# Altium PCB MEGA PROJECTPcbDoc.PcbDoc
Units mm, origin at the board's own origin, x right, y up, seen from the top; angles counter-clockwise.
Board outline 68.2 x 34.42 mm, 2 copper layers (Top Layer, Bottom Layer), stack 1.569 mm thick; 26 components, 32 nets, 117 pads, 12 vias.
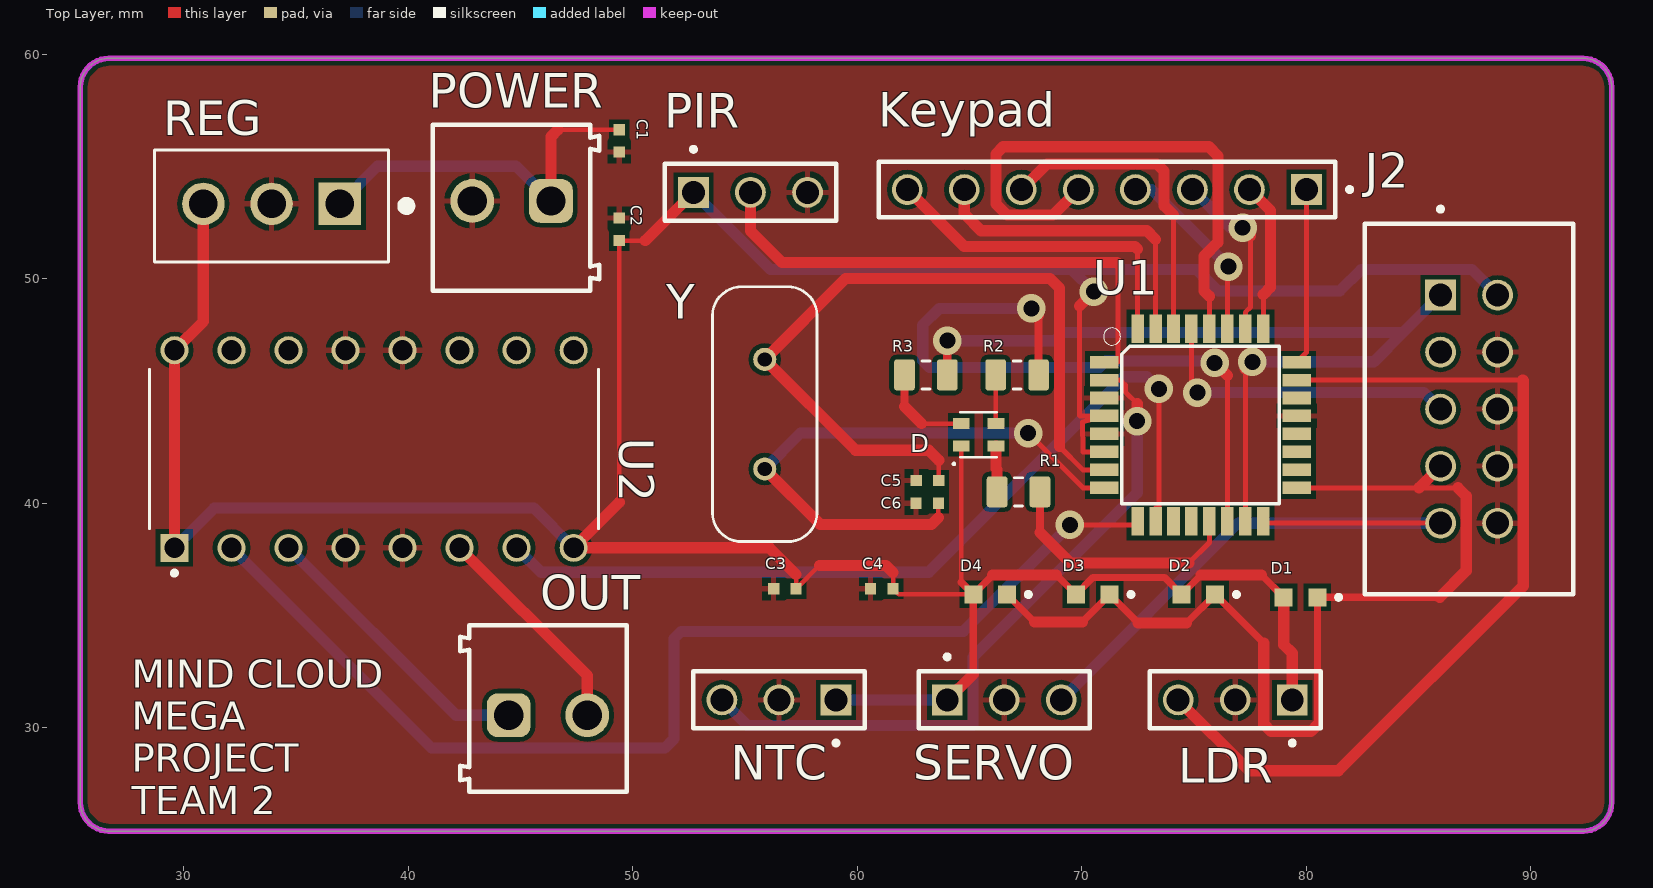
[diagram p0: Top Layer view]
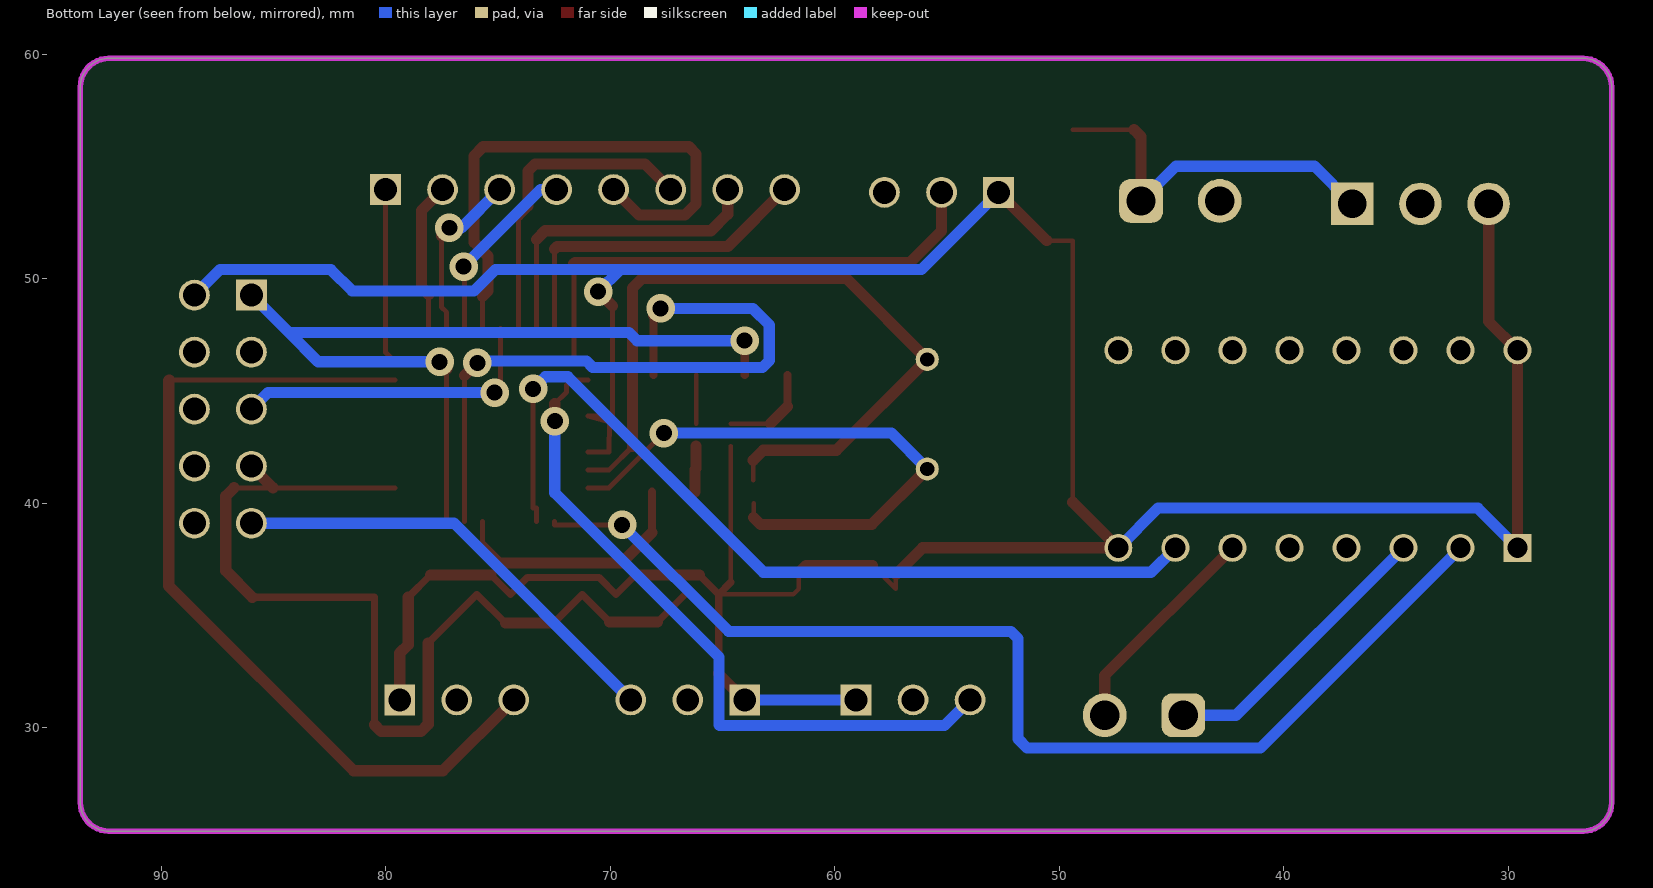
[diagram p1: Bottom Layer view, seen from below]
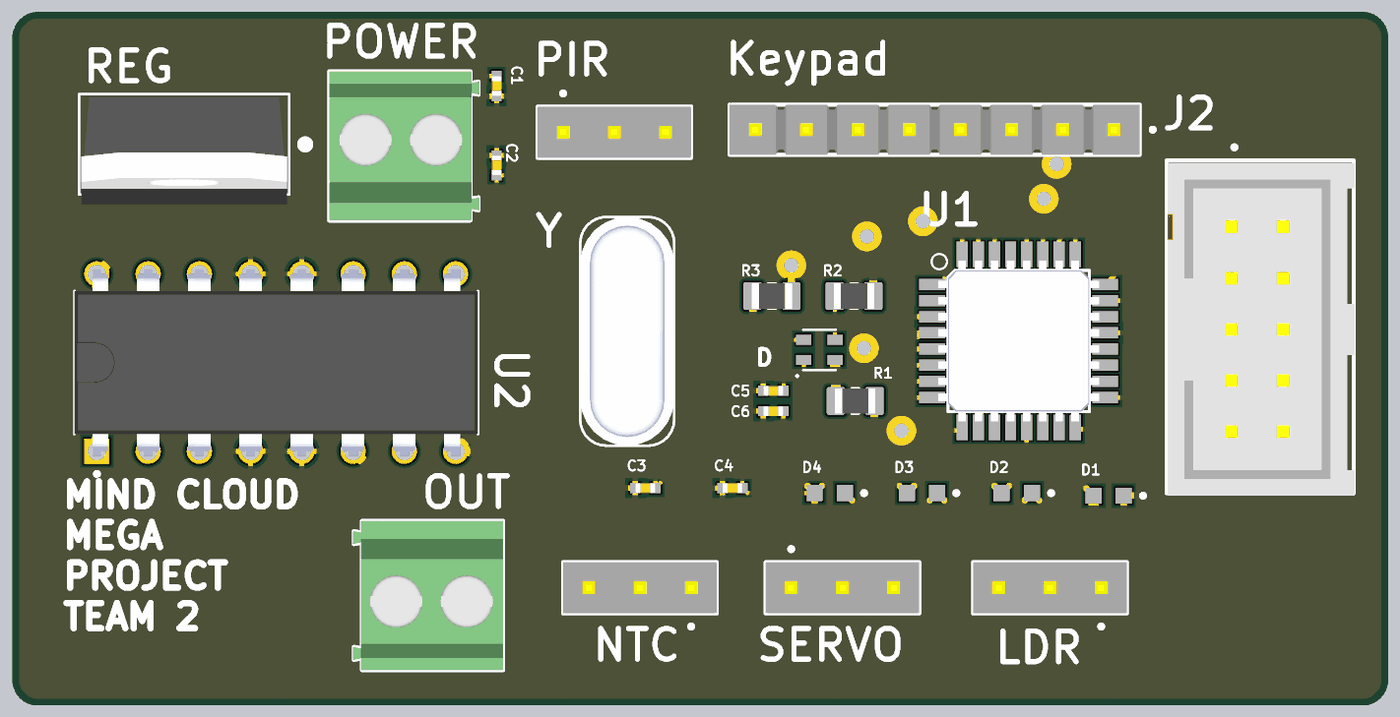
[diagram p2: 3D render of the assembled board from above, using the file's embedded part models]

## Layer stack, top to bottom
Top Solder: solder mask 0.0254, SM-001, Dk 4
Top Layer: signal copper 0.035
Dielectric 1: core 1.4986, Core-043, Dk 4.3
Bottom Layer: signal copper 0.035
Bottom Solder: solder mask 0.0254, SM-001, Dk 4

## Board outline
25.4,26.67 25.4,28.321 25.4,58.547 cw(c26.67,58.547) 26.67,59.817 92.329,59.817 cw(c92.329,58.547) 93.599,58.547 93.599,26.67 cw(c92.329,26.67) 92.329,25.4 26.67,25.4 cw(c26.67,26.67)

## Design rules (kind name [scope] priority, off if disabled: settings)
Clearance [All] p1: gap=0.2 ignorepadtopadclearanceinfootprint=FALSE
PolygonConnect [All] p1: connectstyle=Relief reliefconductorwidth=0.254 reliefentries=4 polygonreliefangle="90 Angle" airgapwidth=0.254
RoutingVias [All] p1: holewidth=0.711 width=1.27 viastyle="Through Hole" minholewidth=0.711 minwidth=1.27 maxholewidth=0.711 maxwidth=1.27
SMDNeckDown [All] p1: percent=40.000
SolderMaskExpansion [All] p1: expansion=0.102 istentingtop=FALSE
Width [All] p1: maxlimit=0.7 minlimit=0.1 preferedwidth=0.5
30 further rules are at their usual default settings.

## Components (designator, comment, footprint, x,y, rotation, side; value= is the part's Value field where it differs from the comment)
C1 "330pF" CAP 49.403,56.142 r270 top
C2 "330pF" CAP 49.403,52.205 r270 top
C3 "100pF" CAP 56.777,36.195 r0 top
C4 "100pF" CAP 61.095,36.195 r0 top
C5 "22pF" CAP 63.127,41.021 r0 top
C6 "22pF" CAP 63.119,40.005 r0 top
D "RGB" RGB 65.405,43.053 r90 top
D1 "LED WHITE" "LED WHITE" 79.744,35.814 r0 top
D2 "LED WHITE" "LED WHITE" 75.192,35.941 r0 top
D3 "LED WHITE" "LED WHITE" 70.493,35.941 r0 top
D4 "LED WHITE" "LED WHITE" 65.921,35.941 r0 top
J2 "10 PIN" "10 PIN" 85.979,49.276 r270 top
Keypad "8 PIN" "8 PIN" 71.12,53.975 r0 top
LDR "3 PIN" "3 PIN" 76.835,31.242 r90 top
NTC "3 PIN" "3 PIN" 56.515,31.242 r90 top
OUT "691214110002" 691214110002 46.228,30.861 r0 top (schematic designator J1)
PIR "3 PIN" "3 PIN" 55.245,53.848 r270 top
POWER "691214110002" 691214110002 44.605,53.167 r180 top (schematic designator J?)
R1 "330" RES 67.183,40.513 r0 top
R2 "330" RES 67.122,45.72 r0 top
R3 "330" RES 63.058,45.72 r0 top
REG "REG" REG 33.917,53.245 r180 top (schematic designator *)
SERVO "3 PIN" "3 PIN" 66.548,31.242 r270 top
U1 "ATMEGA8A" ATMEGA8A 75.286,43.491 r0 top
U2 "L293D" L293D 38.481,42.418 r90 top
Y "Crystal" Crystil 55.88,43.969 r90 top

## Footprints (in the part's own frame and the unit in brackets; to place one, negate y for a bottom-side part, rotate by r counter-clockwise, add the part's x,y. Pads: shape width x height; smd on the part's side, far side on the other; paste and mask are expansions set on the pad)
"3 PIN" [mm]
  rect 1.37x1.37 / inner round 1.37 / far side rect 1.37x1.37 hole 1.02: 01(0,-2.54)
  round 1.37 hole 1.02: 02(0,0) 03(0,2.54)
  silkscreen extent -2.02,-3.81 1.27,3.81, body extent -1.27,-3.81 1.27,3.81, height 7.89
"8 PIN" [mm]
  rect 1.37x1.37 / inner round 1.37 / far side rect 1.37x1.37 hole 1.02: 01(8.89,0)
  round 1.37 hole 1.02: 02(6.35,0) 03(3.81,0) 04(1.27,0) 05(-1.27,0) 06(-3.81,0) 07(-6.35,0) 08(-8.89,0)
  silkscreen extent -10.16,-1.24 10.91,1.24, body extent -10.16,-1.24 10.16,1.24, height 7.89
"10 PIN" [mm]
  rect 1.37x1.37 hole 1.02: 01(0,0)
  round 1.37 hole 1.02: 02(0,2.54) 03(2.54,0) 04(2.54,2.54) 05(5.08,0) 06(5.08,2.54) 07(7.62,0) 08(7.62,2.54) 09(10.16,0) 10(10.16,2.54)
  silkscreen extent -3.92,-3.36 13.33,5.9, body extent -3.05,-3.3 13.46,5.97, height 8.9
691214110002 [mm] "3.50 mm Horizontal Entry Modular, 2p"
  rrect50% 1.95x1.95 hole 1.3: 1(-1.75,-0.3)
  round 1.95 hole 1.3: 2(1.75,-0.3)
  silkscreen extent -3.9,-3.7 3.5,3.7, body extent -3.95,-3.7 3.5,3.7, height 8.55
ATMEGA8A [mil]
  rect 50x22 smd: 1(-169,110.24) 2(-169,78.74) 3(-169,47.24) 4(-169,15.75) 5(-169,-15.75) 6(-169,-47.24) 7(-169,-78.74) 8(-169,-110.24) 17(169,-110.24) 18(169,-78.74) 19(169,-47.24) 20(169,-15.75) 21(169,15.75) 22(169,47.24) 23(169,78.74) 24(169,110.24)
  rect 22x50 smd: 9(-110.24,-169) 10(-78.74,-169) 11(-47.24,-169) 12(-15.75,-169) 13(15.75,-169) 14(47.24,-169) 15(78.74,-169) 16(110.24,-169) 25(110.24,169) 26(78.74,169) 27(47.24,169) 28(15.75,169) 29(-15.75,169) 30(-47.24,169) 31(-78.74,169) 32(-110.24,169)
  silkscreen extent -170,-138 138,170, body extent -177,-177 177,177, height 21
CAP [mm]
  rect 0.5x0.5 smd: 1(-0.5,0) 2(0.5,0)
  body extent -0.5,-0.25 0.5,0.25, height 0.5
Crystil [mm]
  round 1.03 hole 0.63: 1(-2.44,0) 2(2.44,0)
  silkscreen extent -5.68,-2.33 5.68,2.33, body extent -5.67,-2.33 5.67,2.33, height 3.51
L293D [mm]
  rect 1.25x1.25 / inner round 1.25 / far side rect 1.25x1.25 hole 0.9: 1(-4.4,8.89)
  round 1.25 hole 0.9: 2(-4.4,6.35) 3(-4.4,3.81) 4(-4.4,1.27) 5(-4.4,-1.27) 6(-4.4,-3.81) 7(-4.4,-6.35) 8(-4.4,-8.89) 9(4.4,-8.89) 10(4.4,-6.35) 11(4.4,-3.81) 12(4.4,-1.27) 13(4.4,1.27) 14(4.4,3.81) 15(4.4,6.35) 16(4.4,8.89)
  silkscreen extent -5.62,-10 3.55,10, body extent -4.62,-10 4.62,10, height 5.1
"LED WHITE" [mm]
  rect 0.8x0.8 smd: A(-0.75,0) C(0.75,0)
  silkscreen extent 1.6,-0.1 1.8,0.1
REG [mm]
  rect 1.89x1.89 hole 1.26: 1(-3.04,-0.095)
  round 1.89 hole 1.26: 2(0,-0.095) 3(3.04,-0.095)
  silkscreen extent -6.2,-2.49 5.21,2.49, body extent -5.1,-2.92 5.1,4.16, height 15.69
RES [mm]
  rrect25% 0.92x1.38 smd: 1(-0.955,0) 2(0.955,0)
  silkscreen extent -0.18,-0.62 0.18,0.62, body extent -1,-0.63 1,0.63, height 0.3
RGB [mm]
  rect 0.5x0.75 smd: 1(-0.5,0.775) 2(0.5,0.775) 3(-0.5,-0.775) 4(0.5,-0.775)
  silkscreen extent -1.35,-0.8 1,1.15

## Part data
C1 C2 C3 C4 C5 C6: library part CAP, "Multilayer Ceramic Capacitors MLCC SMD/SMT"
D: "LED; SMD; 0603; RGB;", MF=OptoSupply, MP="RGB SMD", SnapEDA_Link=https://makerselectronics.com/product/rgb-smd-led-0603-common-cathode
D1 D2 D3 D4: "LED SMD 1206 Warm White"
OUT POWER: library part CMP-1502-02464-2, Color="Blue, Green", Current=10A, Max Operating Temperature=105°C, Min Operating Temperature=-40°C, Voltage=300V, Contact Material=Brass, Contact Plating="Brass, Tin", Current Rating=10A, Height=8.7mm, Housing Material=Nylon, Lead Pitch=3.5mm, Length=7.4mm, Mount="Through Hole", NexarPartId=18818288, Number of Contacts=2, Number of Levels=1, Number of Pins=2, Number of Positions Per Level=2, Number of Rows=1, Packaging=Box, Pitch=3.5052mm, Plating="Brass, Steel", REACH SVHC=Unknown, RoHS=Compliant, Stripping Length=-6mm, Termination=Screw, Voltage Rating=300V, Width=7.9mm, Wire Gauge (Max)=24AWG, Wire Gauge (Min)=16AWG, Wire/Cable Gauge=24AWG
R1 R2 R3: library part RES
U1: "ATmega Microcontroller IC 8-Bit 16MHz 8KB (4K x 16) FLASH", MF=Microchip, MP=ATMEGA8A-AU, Purchase-URL=https://makerselectronics.com/product/atmega8a-au-8-bit-avr-microcontroller-8kb-1kb-flash-23-2-7v5-5v-avr-16mhz-tqfp-32
U2: "Bipolar Motor Driver - Parallel 16-PowerDIP", MF=STMicroelectronics, MP=L293D, Purchase-URL=https://makerselectronics.com/product/l293d-quadruple-half-h-driver-dip-16
Y: "Crystal 16.000MHz 49S 20PPM 20pF 40Ω", Link=https://makerselectronics.com/product/crystal-16-000mhz-49s-20ppm-20pf-40%cf%89, MF="ECS Inc.", MP=ECS-160-S-4

## Via types
v1: diameter 1.27, hole 0.711, Top Layer to Bottom Layer, 12 vias

## Nets (pads, with @x,y where several pads share a name; then routed paths per layer and width w, separated by ;. In a path a pad name is that pad's centre, name@x,y a point inside that pad or via, vN(x,y) a via of type N, cw(c..) or ccw(c..) an arc to the next point about the centre after c; other vN are vias at no path point)
+5: C2.2 C3.2 C4.2 D1.A D2.A D3.A D4.A D.1 J2.02 LDR.01 NTC.01 PIR.01 REG.3 SERVO.01 U1.4 U1.6 U2.1 U2.8 U2.16 | length 161.8
  Top Layer w0.2: 49.403,40.05 C2.2 50.562,51.705 ; 57.277,36.83 C3.2 58.318,37.236 ; 61.595,36.919 C4.2 61.849,35.941 D4.A ; 64.63,36.482 D.1
  Top Layer w0.224: 69.901,48.793 69.901,43.916 69.926,43.891 U1.4 70.028,43.624 70.053,42.291 U1.6
  Top Layer w0.32: 64.63,36.482 D4.A ; 65.171,32.405 D4.A ; 66.035,36.805 D4.A ; 68.879,36.805 D3.A 70.505,36.703 73.68,36.703 D2.A 75.306,36.805 ; 78.003,36.805 D1.A
  Top Layer w0.5: U2.1 U2.16 30.877,48.104 REG.3 ; 49.403,40.05 U2.8 56.089,38.018 57.277,36.83 ; 50.562,51.705 PIR.01 ; 58.318,37.236 61.277,37.236 61.595,36.919 ; SERVO.01 65.171,32.405 ; 66.035,36.805 68.879,36.805 ; 69.901,48.793 v1(70.536,49.428) ; 75.306,36.805 78.003,36.805 ; D1.A 78.994,33.706 79.375,33.325 LDR.01
  Bottom Layer w0.5: U2.1 31.366,39.793 45.596,39.793 U2.8 ; PIR.01 56.134,50.419 69.545,50.419 ; NTC.01 SERVO.01 ; v1(70.536,49.428) 69.545,50.419 ; J2.02 87.376,50.419 82.45,50.419 81.487,49.456 76.073,49.456 75.11,50.419 69.545,50.419
GND: C1.2 C2.1 C3.1 C4.1 C5.1 C6.1 J2.04 J2.06 J2.08 J2.10 LDR.02 NTC.02 PIR.03 POWER.2 REG.2 SERVO.02 U1.3 U1.5 U1.21 U2.4 U2.5 U2.12 U2.13
INP1: U1.9 U2.2 | length 50.9
  Top Layer w0.224: v1(69.469,39.04) 72.486,39.04 U1.9
  Bottom Layer w0.5: U2.2 41.041,29.108 51.435,29.108 51.841,29.515 51.841,33.972 52.159,34.29 64.719,34.29 v1(69.469,39.04)
INP2: U1.10 U2.7 | length 38.9
  Top Layer w0.224: U1.10 73.286,39.802 73.431,39.802 v1(73.431,45.099)
  Bottom Layer w0.5: U2.7 45.917,36.932 63.182,36.932 71.884,45.633 72.898,45.633 v1(73.431,45.099)
INP3: U1.11
INP4: U1.12
LDR: LDR.03 U1.23 | length 39.3
  Top Layer w0.224: U1.23 89.637,45.491
  Top Layer w0.5: LDR.03 77.445,28.092 81.432,28.092 89.662,36.322 89.662,45.466 89.637,45.491
NetC5_2: C5.2 U1.7 Y.2 | length 34.8
  Top Layer w0.2: C5.2 63.627,41.923
  Top Layer w0.224: 69.012,42.527 70.048,41.491 U1.7
  Top Layer w0.5: 63.627,41.923 63.182,42.367 59.922,42.367 Y.2 59.484,50.013 68.58,50.013 69.012,49.581 69.012,42.527
NetC6_2: C6.2 U1.8 Y.1 | length 26.3
  Top Layer w0.2: 63.619,39.37 C6.2
  Top Layer w0.224: v1(67.615,43.129) 70.053,40.691 U1.8
  Top Layer w0.5: Y.1 58.356,39.052 63.302,39.052 63.619,39.37
  Bottom Layer w0.5: Y.1 57.48,43.129 v1(67.615,43.129)
NetD_2: D.2 R3.1 | length 4.2
  Top Layer w0.2: 62.865,43.553 D.2
  Top Layer w0.368: 62.103,44.315 R3.1
  Top Layer w0.5: 62.103,44.315 62.865,43.553
NetD_3: D.3 R1.1 | length 2.1
  Top Layer w0.5: D.3 66.18,41.552 66.228,41.504 R1.1
NetD_4: D.4 R2.1 | length 2.2
  Top Layer w0.2: R2.1 66.167,43.553 D.4
NetJ1_1: OUT.1 U2.3 | length 12.9
  Bottom Layer w0.5: U2.3 42.128,30.561 OUT.1
NetJ1_2: OUT.2 U2.6 | length 9.8
  Top Layer w0.5: U2.6 47.978,32.331 OUT.2
NetJ2_01: J2.01 R3.2 U1.15 | length 38.8
  Top Layer w0.224: U1.15 v1@77.286,45.987
  Top Layer w0.368: R3.2 v1(64.013,47.244)
  Top Layer w0.5: v1@77.286,45.987 v1(77.603,46.304)
  Bottom Layer w0.5: v1(64.013,47.244) 68.803,47.244 69.162,47.603 84.306,47.603 ; v1(77.603,46.304) 83.007,46.304 84.306,47.603 ; J2.01 84.306,47.603
NetJ2_03: J2.03
NetJ2_05: J2.05 U1.29 | length 14.1
  Top Layer w0.224: v1@74.886,45.193 U1.29
  Top Layer w0.5: v1@74.886,45.193 v1(75.146,44.933)
  Bottom Layer w0.5: v1(75.146,44.933) 85.242,44.933 J2.05
NetJ2_09: J2.09 SERVO.03 U1.16 | length 28.1
  Top Layer w0.224: U1.16 78.086,39.116 J2.09
  Bottom Layer w0.5: SERVO.03 76.962,39.116 J2.09
NetR1_2: R1.2 U1.13 | length 11.3
  Top Layer w0.224: 74.771,37.338 75.686,38.252 U1.13
  Top Layer w0.368: 68.138,38.694 R1.2
  Top Layer w0.5: 68.138,38.694 69.494,37.338 74.771,37.338
NetR2_2: R2.2 U1.14 | length 30.4
  Top Layer w0.224: U1.14 76.486,45.688
  Top Layer w0.368: R2.2 v1@68.077,48.362
  Top Layer w0.5: v1(67.759,48.679) v1@68.077,48.362 ; v1(75.921,46.253) 76.486,45.688
  Bottom Layer w0.5: v1(67.759,48.679) 63.652,48.679 62.916,47.942 62.916,46.355 63.227,46.044 70.778,46.044 71.066,46.333 75.841,46.333 v1(75.921,46.253)
NTC: NTC.03 U1.2 | length 31.1
  Top Layer w0.224: U1.2 71.712,45.491 71.94,45.263 71.94,44.958 72.466,44.432
  Top Layer w0.5: v1(72.466,43.663) 72.466,44.432
  Bottom Layer w0.5: NTC.03 55.118,30.099 65.126,30.099 65.151,30.124 65.151,33.147 72.466,40.462 v1(72.466,43.663)
P1: Keypad.08 U1.32 | length 14.9
  Top Layer w0.224: U1.32 72.486,51.327
  Top Layer w0.5: Keypad.08 64.765,51.44 72.372,51.44 72.486,51.327
P2: Keypad.07 U1.31 | length 14
  Top Layer w0.224: U1.31 73.286,51.752
  Top Layer w0.5: Keypad.07 64.77,52.877 65.507,52.14 72.898,52.14 73.286,51.752
P3: Keypad.06 U1.30 | length 14.1
  Top Layer w0.224: U1.30 74.086,52.832
  Top Layer w0.5: Keypad.06 68.453,55.118 73.343,55.118 73.66,54.8 73.66,53.258 74.086,52.832
P4: Keypad.05 U1.28 | length 24.8
  Top Layer w0.224: U1.28 75.686,49.221
  Top Layer w0.5: Keypad.05 68.715,52.84 66.675,52.84 66.175,53.34 66.175,55.562 66.492,55.88 75.667,55.88 76.073,55.474 76.073,51.631 75.445,51.003 75.445,49.461 75.686,49.221
P5: Keypad.04 U1.27 | length 8.3
  Top Layer w0.224: U1.27 v1@76.486,50.501
  Top Layer w0.5: v1@76.486,50.501 v1(76.53,50.546)
  Bottom Layer w0.5: Keypad.04 73.101,53.975 v1(76.53,50.546)
P6: Keypad.03 U1.26 | length 7.7
  Top Layer w0.224: U1.26 77.286,48.507 77.521,48.743 v1@77.521,51.918
  Top Layer w0.5: v1(77.165,52.273) v1@77.521,51.918
  Bottom Layer w0.5: Keypad.03 76.632,52.273 v1(77.165,52.273)
P7: Keypad.02 U1.25 | length 6.7
  Top Layer w0.224: U1.25 78.086,49.303
  Top Layer w0.5: Keypad.02 78.408,53.037 78.408,49.626 78.086,49.303
P8: Keypad.01 U1.24 | length 7.9
  Top Layer w0.224: U1.24 80.01,46.723 Keypad.01
PB5: D1.C D2.C D3.C D4.C J2.07 U1.17 | length 45.8
  Top Layer w0.224: U1.17 85.014,40.691 86.753,40.691
  Top Layer w0.32: D4.C 67.894,34.718 ; 70.02,34.718 D3.C 72.517,34.667 ; 74.668,34.667 D2.C 78.105,33.778 ; 80.494,30.138 D1.C 85.941,35.814
  Top Layer w0.5: 67.894,34.718 70.02,34.718 ; 72.517,34.667 74.668,34.667 ; 78.105,33.778 78.105,30.162 78.422,29.845 80.2,29.845 80.494,30.138 ; 85.014,40.691 J2.07 ; 85.941,35.814 87.122,36.995 87.122,40.322 86.753,40.691
PIR: PIR.02 U1.1 | length 23.7
  Top Layer w0.224: U1.1 71.621,46.291 71.621,50.673
  Top Layer w0.5: PIR.02 55.245,52.133 56.655,50.724 71.57,50.724 71.621,50.673
VCC: C1.1 POWER.1 REG.1 | length 16.8
  Top Layer w0.2: 46.672,56.642 C1.1
  Top Layer w0.5: POWER.1 46.355,56.325 46.672,56.642
  Bottom Layer w0.5: REG.1 38.633,55.016 44.806,55.016 POWER.1
pads on no net: U1.18 U1.19 U1.20 U1.22 U2.9 U2.10 U2.11 U2.14 U2.15

## Polygon pours and split planes (outlines as drawn)
GND on Top Layer "GND" (solid, pour order 2): 25.4,58.547 25.4,26.67 26.67,25.4 26.797,25.527 92.71,25.527 92.71,25.781 93.599,26.67 93.599,58.674 92.456,59.817 73.914,59.817 73.787,59.944 73.66,59.817 26.67,59.817
no net on Top Layer "NONET_L01_P001" (solid, pour order 1): 29.083,38.1
no net on Top Layer "NONET_L01_P000" (solid, pour order 0): 26.289,40.132

## Keep-outs
Keep-Out Layer:
  the board outline again, w0.254

## Silkscreen, mask and mechanical layers (free items; w line width, h text height)
Top Overlay:
  text "MIND CLOUD / MEGA  / PROJECT / TEAM 2" at 27.686,26.162 h1.25